# Altium PCB J-Link ARM-OB.PcbDoc
Units mil, origin at the board's own origin, x right, y up, seen from the top; angles counter-clockwise.
Board outline 1424 x 783 mil, 2 copper layers (Top Layer, Bottom Layer); 28 components, 28 nets, 112 pads, 16 vias.
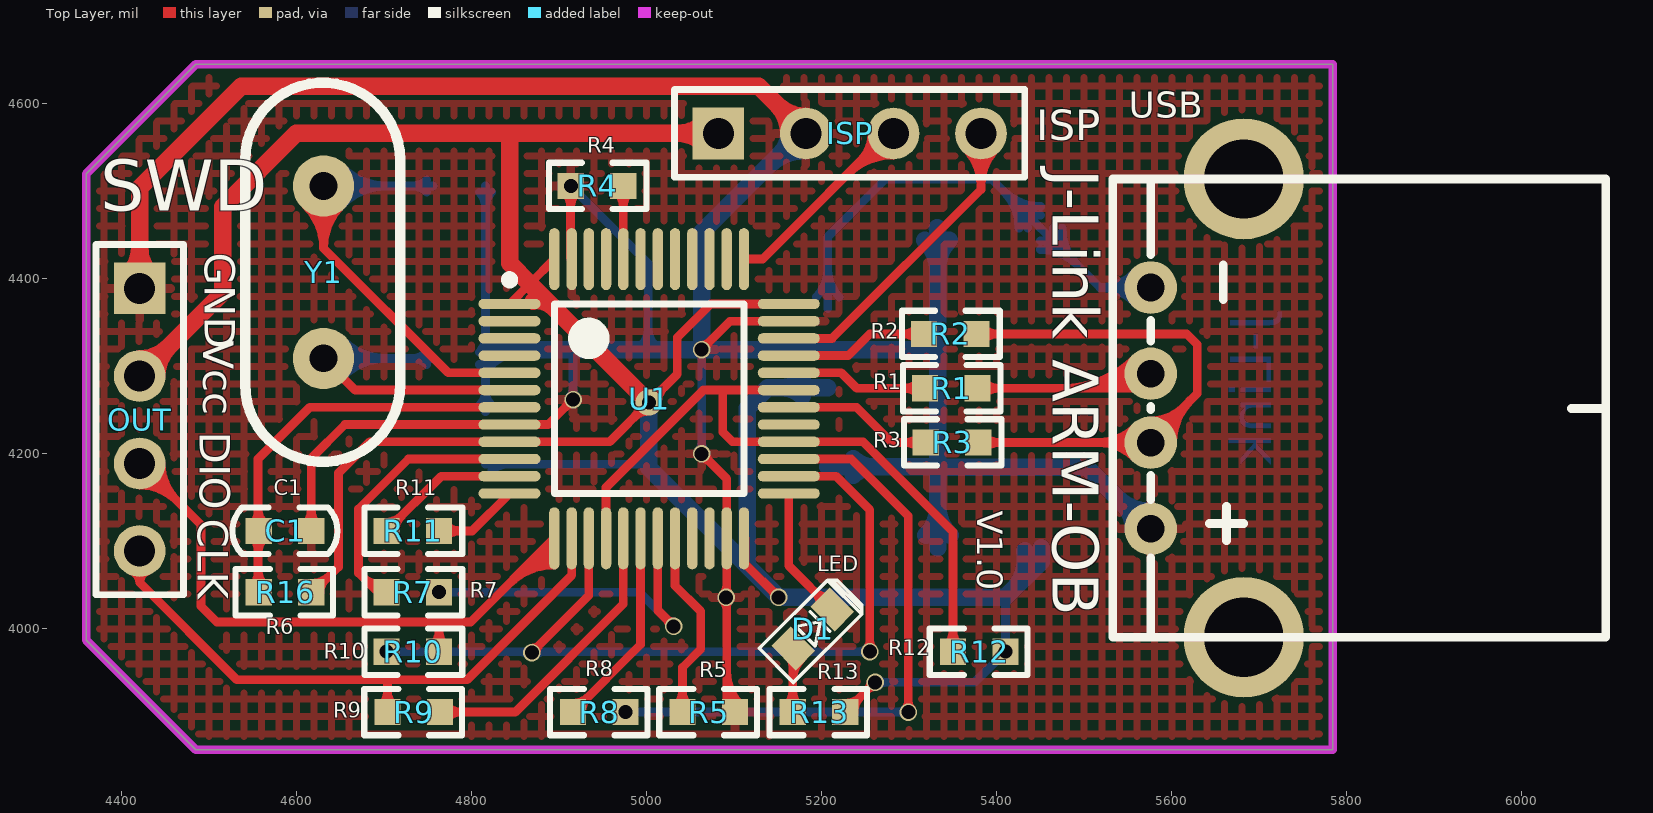
[diagram p0: Top Layer view]
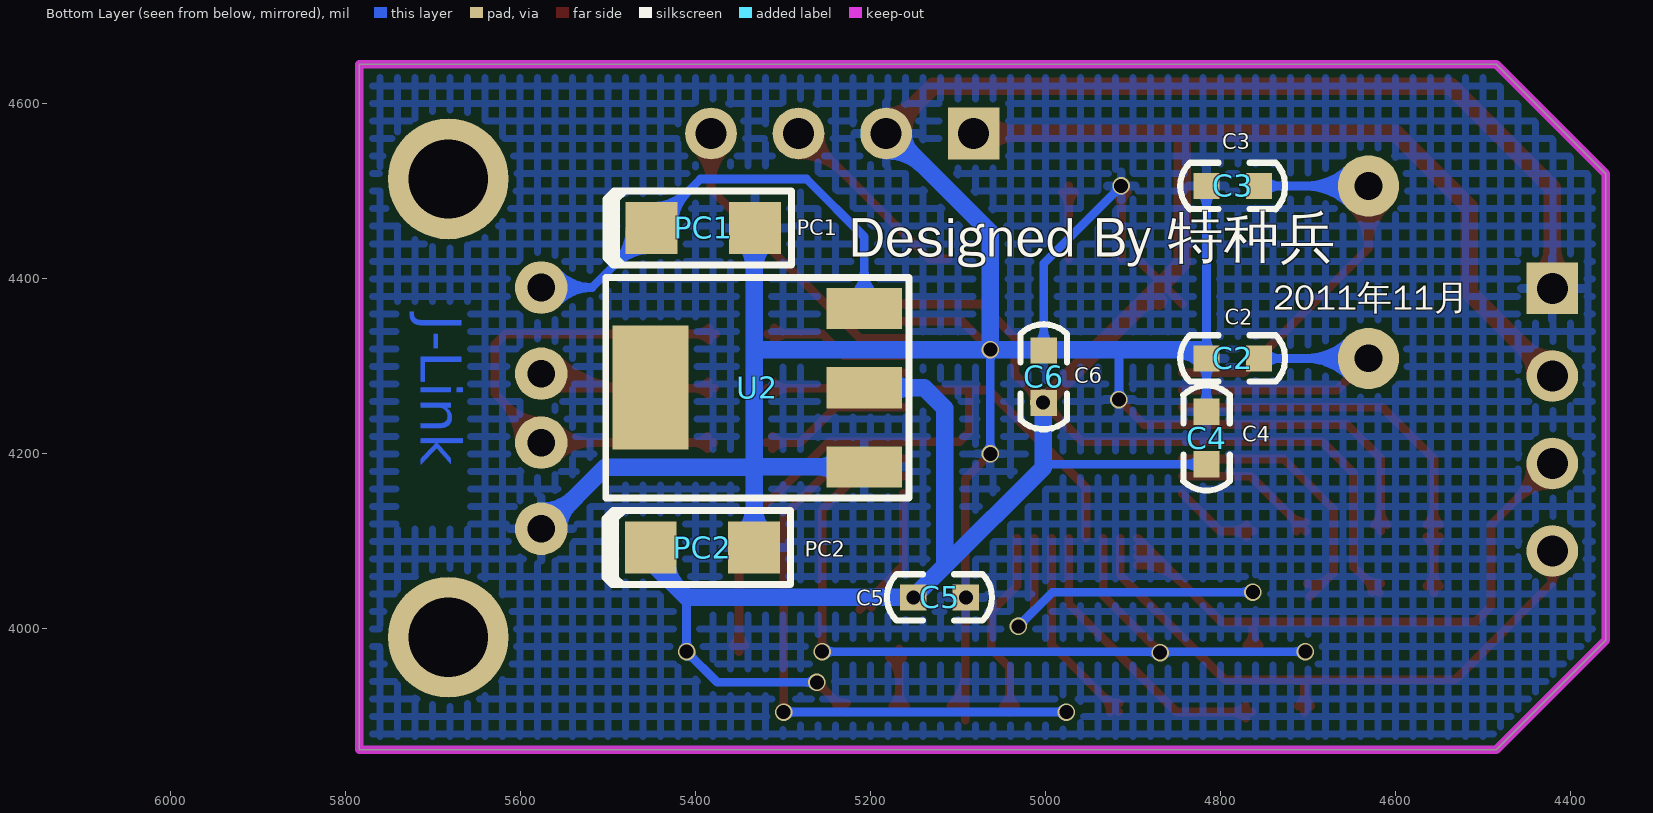
[diagram p1: Bottom Layer view, seen from below]
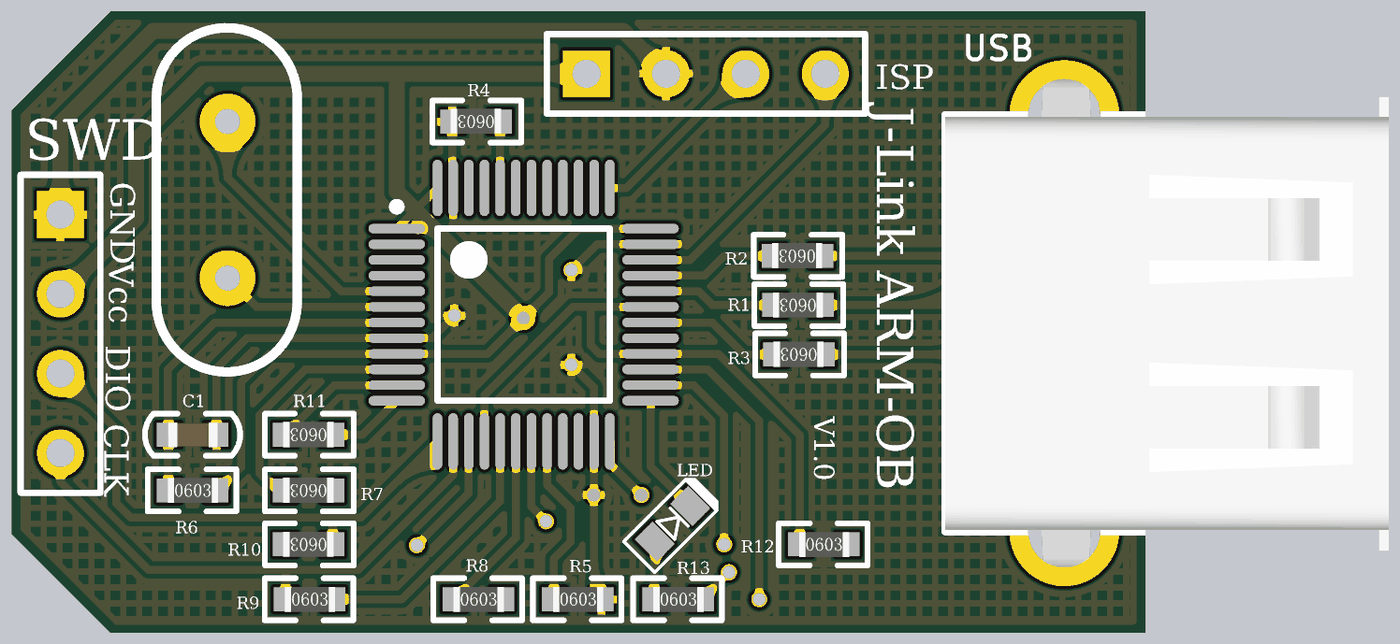
[diagram p2: 3D render of the assembled board from above, using the file's embedded part models]
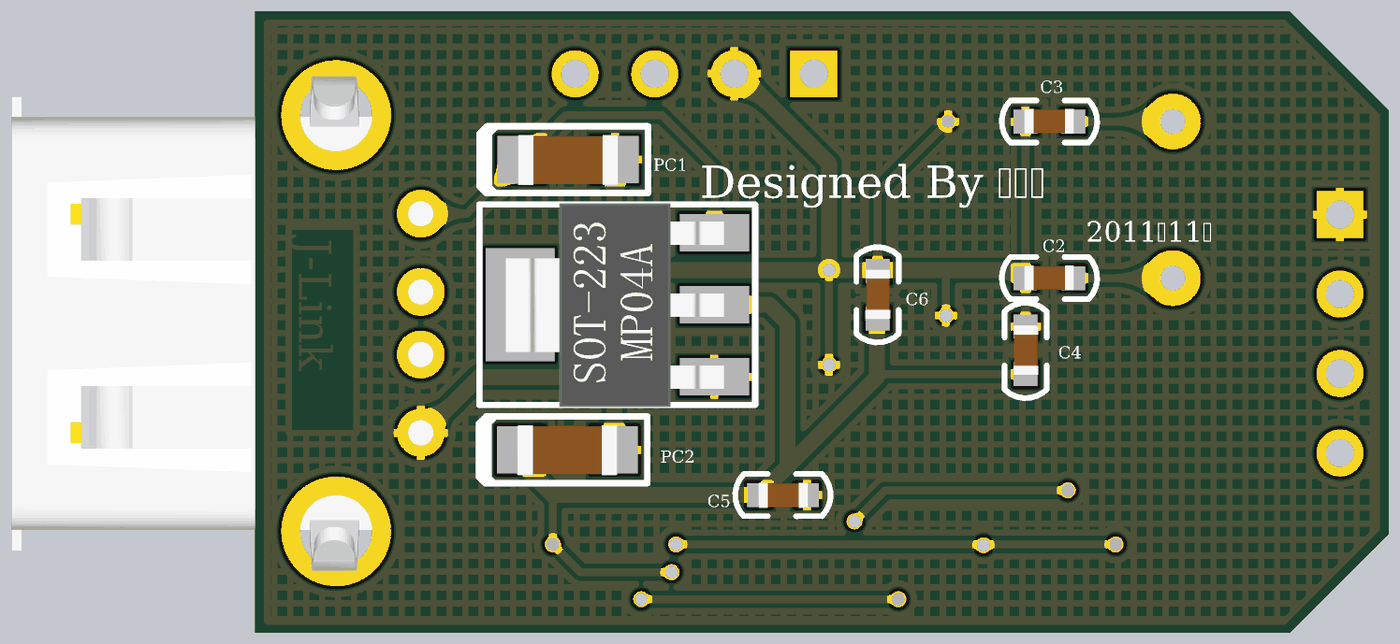
[diagram p3: 3D render of the assembled board from below, using the file's embedded part models]

## Layer stack, top to bottom
Top Layer: signal copper 1.4
Dielectric: dielectric 12.6, FR-4, Dk 4.8
Bottom Layer: signal copper 1.4

## Board outline
4360,4520 4485,4645 5784,4645 5784,3862 4485,3862 4360,3987

## Design rules (kind name [scope] priority, off if disabled: settings)
Clearance [All] p1: gap=6
PolygonConnect [All] p1: connectstyle=Relief reliefconductorwidth=10 reliefentries=4 polygonreliefangle="90 Angle"
RoutingVias [All] p1: holewidth=28 width=50 viastyle="Through Hole" minholewidth=28 minwidth=50 maxholewidth=28 maxwidth=50
SilkscreenOverComponentPads [All] p1: minsilkscreentomaskgap=10
SolderMaskExpansion [All] p1: expansion=4
Width [All] p1: maxlimit=50 minlimit=10 preferedwidth=10
27 further rules are at their usual default settings.

## Components (designator, comment, footprint, x,y, rotation, side; value= is the part's Value field where it differs from the comment)
C1 "" C0603 4557,4112 r0 top
C2 "" C0603 4756,4309 r0 bottom
C3 "" C0603 4756,4506 r0 bottom
C4 "" C0603 4816,4188 r90 bottom
C5 "" C0603 5151,4036 r180 bottom
C6 "" C0603 5002,4258 r90 bottom
D1 "LED" LED0603 5190,4000 r45 top
ISP "SWD" HDR1X4 5082,4566 r0 top
OUT "SWD" HDR1X4 4421,4389 r270 top
PC1 "" C1206A 5450,4458 r180 bottom
PC2 "" C1206A 5451,4093 r180 bottom
R1 "" R0603 5378,4275 r180 top
R2 "" R0603 5377,4337 r180 top
R3 "" R0603 5379,4213 r180 top
R4 "" R0603 4973.47,4506 r180 top
R5 "" R0603 5041,3905 r0 top
R7 "" R0603 4763,4042 r180 top
R8 "" R0603 4916,3905 r0 top
R9 "" R0603 4704,3905 r0 top
R10 "" R0603 4763,3974 r180 top
R11 "" R0603 4763,4112 r180 top
R12 "" R0603 5350,3974 r0 top
R13 "" R0603 5167,3905 r0 top
R16 "" R0603 4557,4042 r0 top
U1 "STM32F103C8T6" LQFP48_N 5003,4263 r0 top
U2 "AMS1117 3.3" SOT-223 5207,4185 r90 bottom
USB "USB公口" USB-H 5576,4390 r90 top
Y1 "8MHz" JZ 4631,4506 r90 top

## Footprints (in the part's own frame and the unit in brackets; to place one, negate y for a bottom-side part, rotate by r counter-clockwise, add the part's x,y. Pads: shape width x height; smd on the part's side, far side on the other; paste and mask are expansions set on the pad)
C0603 [mil]
  rect 30x30 smd: 1(0,0) 2(60,0)
  silkscreen extent -30,-27 90,27, body extent -1,-16 62,15, height 24
C1206A [mm]
  rect 1.5x1.5 smd: 1(0,0) 2(3,0)
  silkscreen extent -1.32,-1.07 4.06,1.07, body extent -0.1,-0.81 3.1,0.79, height 0.95
HDR1X4 [mm] "Connector; Header; 4 Position"
  rect 1.5x1.5 hole 0.9: 1(0,0)
  round 1.5 hole 0.9: 2(2.54,0) 3(5.08,0) 4(7.62,0)
  silkscreen extent -1.27,-1.27 8.89,1.27
JZ [mil]
  round 70 hole 31.5: 1(0,0) 2(-197,0)
  silkscreen extent -315,-88 118,90
LED0603 [mm]
  rect 0.8x1 smd: 1(-0.8,0) 2(0.8,0)
  silkscreen extent -1.5,-0.7 1.5,0.7
LQFP48_N [mm] "Thin QFP, 48-Leads, Body 7x7mm, Pitch 0.5mm, IPC Medium Density"
  oval 1.8x0.3 smd: 1(-4.05,2.75) 2(-4.05,2.25) 3(-4.05,1.75) 4(-4.05,1.25) 5(-4.05,0.75) 6(-4.05,0.25) 7(-4.05,-0.25) 8(-4.05,-0.75) 9(-4.05,-1.25) 10(-4.05,-1.75) 11(-4.05,-2.25) 12(-4.05,-2.75) 25(4.05,-2.75) 26(4.05,-2.25) 27(4.05,-1.75) 28(4.05,-1.25) 29(4.05,-0.75) 30(4.05,-0.25) 31(4.05,0.25) 32(4.05,0.75) 33(4.05,1.25) 34(4.05,1.75) 35(4.05,2.25) 36(4.05,2.75)
  oval 0.3x1.8 smd: 13(-2.75,-4.05) 14(-2.25,-4.05) 15(-1.75,-4.05) 16(-1.25,-4.05) 17(-0.75,-4.05) 18(-0.25,-4.05) 19(0.25,-4.05) 20(0.75,-4.05) 21(1.25,-4.05) 22(1.75,-4.05) 23(2.25,-4.05) 24(2.75,-4.05) 37(2.75,4.05) 38(2.25,4.05) 39(1.75,4.05) 40(1.25,4.05) 41(0.75,4.05) 42(0.25,4.05) 43(-0.25,4.05) 44(-0.75,4.05) 45(-1.25,4.05) 46(-1.75,4.05) 47(-2.25,4.05) 48(-2.75,4.05)
  silkscreen extent -4.17,-2.75 2.75,3.57, body extent -3.5,-3.5 3.5,3.5, height 1.6
R0603 [mil]
  rect 30x30 smd: 1(0,0) 2(60,0)
  silkscreen extent -27,-27 85,27, body extent -1,-16 62,15, height 18
SOT-223 [mm]
  rect 1.2x2.2 smd: 1(0,0) 2(2.3,0) 3(4.6,0)
  rect 3.6x2.2 smd: 4(2.3,6.2)
  silkscreen extent -0.9,-1.3 5.5,7.5, body extent -0.97,-0.31 5.53,6.66
USB-H [mm]
  round 1.524 hole 0.8: 1(0,0) 2(-2.5,0) 3(-4.5,0) 4(-7,0)
  round 3.5 hole 2.3: 5(-10.15,-2.7) 5(3.15,-2.7)
  silkscreen extent -10.15,-13.2 3.15,1.1, body extent -11.4,-13.06 4.4,1.1, height 7.55

## Part data
C1 C2 C3 C4 C5 C6: library part Cap, "Capacitor"
D1: library part LED2, "Typical RED, GREEN, YELLOW, AMBER GaAs LED"
ISP OUT: library part "Header 4", "Header, 4-Pin"
PC1 PC2: library part "Cap Pol3", "Polarized Capacitor (Surface Mount)"
R1 R2 R3 R4 R5 R7 R8 R9 R10 R11 R12 R13 R16: library part Res2, "Resistor"
U1: "STM32 ARM-based 32-bit MCU with 64 Kbytes Flash, 48-pin LQFP, Industrial Temperature"
U2: library part LM117T
USB: library part US
Y1: library part XTAL, "Crystal Oscillator"

## Via types
v1: diameter 20, hole 16, Top Layer to Bottom Layer, 15 vias
v2: diameter 30, hole 16, Top Layer to Bottom Layer, 1 vias

## Nets (pads, with @x,y where several pads share a name; then routed paths per layer and width w, separated by ;. In a path a pad name is that pad's centre, name@x,y a point inside that pad or via, vN(x,y) a via of type N, cw(c..) or ccw(c..) an arc to the next point about the centre after c; other vN are vias at no path point)
GND: C1.2 C2.2 C3.2 C4.2 C5.2 C6.2 ISP.2 OUT.1 PC1.2 PC2.2 R4.2 R5.2 U1.8 U1.23 U1.35 U1.47 U2.1 USB.4 | length 5188.6
  Top Layer w10: OUT.1 OUT.1@4437,4373 ; C1.2@4609.93,4119.07 ccw(c4592.86,4136.14) 4617,4136.14 ccw(c4641.14,4136.14) C1.2@4624.07,4119.07 ; C1.2 4617,4195 4655.47,4233.47 U1.8 4887.47,4233.47 v1(4916,4262) ; R4.2@4906.4,4498.93 cw(c4890.47,4483) 4913,4483 ; R4.2@4909.94,4502.46 cw(c4902.54,4495.07) R4.2@4913,4495.07 ; v1@4911,4262 cw(c4898.93,4262) 4907.46,4253.46 cw(c4916,4244.93) v1@4916,4257 ; U1.47@4913,4423.87 R4.2@4913,4506 ; 4913,4480.72 cw(c4938.76,4480.72) R4.2@4920.54,4498.93 ; R4.2@4913,4492.79 cw(c4926.68,4492.79) R4.2@4917.01,4502.46 ; v1@5063,4195 cw(c5063,4182.93) 5071.54,4191.46 cw(c5080.07,4200) v1@5068,4200 ; v1(5063,4200) 5091.58,4171.42 U1.23 R5.2@5091.58,3896 ; v1(5063,4319.17) 5095.41,4351.58 U1.35 ; v1@5063,4324.17 ccw(c5063,4336.24) 5071.54,4327.71 ccw(c5080.07,4319.17) v1@5068,4319.17 ; v1@5087.46,4032.46 cw(c5077.52,4022.52) 5091.58,4022.52 ; v1@5087.46,4039.54 ccw(c5077.52,4049.48) 5091.58,4049.48 ; 5091.58,3927.74 ccw(c5123.74,3927.74) R5.2 ; 5091.58,3951.88 ccw(c5147.88,3951.88) R5.2@5108.07,3912.07 ; 5091.58,4025.34 cw(c5101.66,4025.34) v1@5094.54,4032.46 ; 5091.58,4046.66 ccw(c5101.66,4046.66) v1@5094.54,4039.54
  Top Layer w20: OUT.1@4407.19,4402.81 ccw(c4373.86,4436.14) 4421,4436.14 ccw(c4468.14,4436.14) OUT.1@4434.81,4402.81 ; OUT.1 4421,4504 4537,4620 5128,4620 ISP.2 ; ISP.2@5162.47,4566 ccw(c5115.33,4566) 5148.66,4599.34 ccw(c5182,4632.67) ISP.2@5182,4585.53
  Bottom Layer w10: C4.2@4808.93,4255.07 ccw(c4791.86,4272.14) 4816,4272.14 ccw(c4840.14,4272.14) C4.2@4823.07,4255.07 ; C2.2@4808.93,4301.93 cw(c4791.86,4284.86) 4816,4284.86 cw(c4840.14,4284.86) C2.2@4823.07,4301.93 ; C2.2@4808.93,4316.07 ccw(c4791.86,4333.14) 4816,4333.14 ccw(c4840.14,4333.14) C2.2@4823.07,4316.07 ; C3.2@4808.93,4498.93 cw(c4791.86,4481.86) 4816,4481.86 cw(c4840.14,4481.86) C3.2@4823.07,4498.93 ; C4.2 C2.2 4816,4317 C3.2 ; v1@4912.46,4265.54 ccw(c4903.93,4274.07) 4916,4274.07 ccw(c4928.07,4274.07) v1@4919.54,4265.54 ; v1@4913.47,4501 cw(c4913.47,4488.93) 4922.01,4497.46 cw(c4930.54,4506) v1@4918.47,4506 ; v1(4913.47,4506) 5002,4417.47 5002,4319.17 C6.2 ; v1(4916,4262) 4916,4318 ; C6.2@4994.93,4325.07 ccw(c4977.86,4342.14) 5002,4342.14 ccw(c5026.14,4342.14) C6.2@5009.07,4325.07 ; v1@5059.46,4203.54 ccw(c5050.93,4212.07) 5063,4212.07 ccw(c5075.07,4212.07) v1@5066.54,4203.54 ; v1@5059.46,4315.64 cw(c5050.93,4307.1) 5063,4307.1 cw(c5075.07,4307.1) v1@5066.54,4315.64 ; v1(5063,4200) v1@5063,4318 ; 5502.41,4185 5502.73,4184.69
  Bottom Layer w20: C2.2@4816,4317 4818.17,4319.17 5002,4319.17 v1(5063,4319.17) ; C2.2@4819.54,4305.46 cw(c4852.63,4272.37) 4852.63,4319.17 ; 5138.42,4528.42 cw(c5182,4484.84) ISP.2@5182,4546.47 ; 5152.91,4542.91 ccw(c5129.81,4566) ISP.2@5162.47,4566 ; ISP.2@5182,4572 5063,4453 v1(5063,4319.17) ; U2.1 5331.89,4185 ; U2.1@5236.32,4175.37 cw(c5259.57,4152.11) 5259.57,4185 cw(c5259.57,4217.89) U2.1@5236.32,4194.63 ; PC1.2@5318.08,4444.19 cw(c5282.33,4408.44) 5332.89,4408.44 ; PC2.2@5319.08,4106.81 ccw(c5285.75,4140.14) 5332.89,4140.14 ccw(c5380.03,4140.14) PC2.2@5346.7,4106.81 ; PC1.2 5332.89,4457 5332.89,4319.17 ; PC2.2 5332.89,4184.69 ; 5332.89,4413.27 cw(c5376.62,4413.27) PC1.2@5345.7,4444.19 ; 5536.74,4150.67 ccw(c5576,4189.94) USB.4@5576,4134.41 ; 5543.98,4143.43 cw(c5514.96,4114.41) USB.4@5556,4114.41 ; USB.4@5574.5,4112.91 5502.73,4184.69 5332.89,4184.69 ; v1(5063,4319.17) 5332.89,4319.17 ; 5331.89,4185 5332.2,4184.69 5332.89,4184.69 ; 5331.89,4185 5332.89,4186 5332.89,4319.17
  other v1: 5091,4036
JTCK: ISP.3 U1.37 | length 364.6
  Top Layer w10: U1.37 5132.45,4422.45 ISP.3@5282,4572 ; 5229.89,4519.89 cw(c5282,4467.77) ISP.3@5282,4541.47 ; 5244.37,4534.37 ccw(c5212.74,4566) ISP.3@5257.47,4566 ; 5246.96,4536.96 cw(c5282,4501.91) ISP.3@5282,4551.47
JTMS: ISP.4 U1.34 | length 508.1
  Top Layer w10: U1.34 5211.9,4331.9 5382,4502 ISP.4@5382,4572 ; ISP.4@5364.66,4548.66 cw(c5322.79,4506.79) 5382,4506.79 cw(c5441.21,4506.79) ISP.4@5399.34,4548.66 ; ISP.4@5371.73,4555.73 cw(c5346.93,4530.93) 5382,4530.93 cw(c5417.07,4530.93) ISP.4@5392.27,4555.73
LED: D1.2 U1.25 | length 193.9
  Top Layer w10: U1.25 5162.45,4072.09 D1.2 ; D1.2@5198.74,4025.05 ccw(c5172.79,4025.05) 5191.14,4043.4 ccw(c5209.49,4061.75) D1.2@5209.49,4035.8
NetD1_1: D1.1 R13.1 | length 150.7
  Top Layer w10: R13.1@5159.93,3912.07 ccw(c5142.86,3929.14) 5167,3929.14 ccw(c5191.14,3929.14) R13.1@5174.07,3912.07 ; D1.1@5162.91,3967.35 cw(c5153.05,3957.48) D1.1@5167,3957.48 ; R13.1 D1.1@5167,3977 ; 5167,3940.52 cw(c5204.94,3940.52) D1.1@5178.11,3967.35
NetR1_1: R1.1 USB.2 | length 493.4
  Top Layer w10: R1.1 5556.42,4275 USB.2@5573,4291.58 ; R1.1@5385.07,4267.93 cw(c5402.14,4250.86) 5402.14,4275 cw(c5402.14,4299.14) R1.1@5385.07,4282.07 ; 5475.63,4275 ccw(c5475.63,4391.95) USB.2@5558.32,4309.25 ; 5499.77,4275 ccw(c5499.77,4367.8) USB.2@5565.39,4302.18 ; 5523.91,4275 ccw(c5523.91,4343.66) USB.2@5572.46,4295.11 ; 5548.06,4275 ccw(c5548.06,4319.52) USB.2@5579.54,4288.04
NetR2_1: R2.1 R3.1 USB.3 | length 965.4
  Top Layer w10: R2.1 5617,4337 5629,4325 5629,4269 5573,4213 R3.1 ; R2.1@5384.07,4329.93 cw(c5401.14,4312.86) 5401.14,4337 cw(c5401.14,4361.14) R2.1@5384.07,4344.07 ; R3.1@5386.07,4205.93 cw(c5403.14,4188.86) 5403.14,4213 cw(c5403.14,4237.14) R3.1@5386.07,4220.07 ; 5515.25,4213 cw(c5515.25,4152.08) USB.3@5558.32,4195.16 ; 5516.04,4213 ccw(c5516.04,4272.79) USB.3@5558.32,4230.51 ; 5539.39,4213 cw(c5539.39,4176.22) USB.3@5565.39,4202.23 ; 5540.19,4213 ccw(c5540.19,4248.65) USB.3@5565.39,4223.44 ; USB.3@5576,4227.84 ccw(c5576,4256.41) 5596.2,4236.2 ; USB.3@5576,4237.84 ccw(c5576,4290.55) 5613.27,4253.27 ; USB.3@5591,4212.84 cw(c5634.85,4212.84) 5603.84,4243.84 ; USB.3@5601,4212.84 cw(c5669,4212.84) 5620.92,4260.92
NetR4_1: R4.1 U1.44 | length 121.5
  Top Layer w10: R4.1@4966.4,4498.93 cw(c4949.33,4481.86) 4973.47,4481.86 cw(c4997.61,4481.86) R4.1@4980.54,4498.93 ; U1.44 R4.1
NetR5_1: R5.1 U1.20 | length 257.4
  Top Layer w10: U1.20 5032.53,4049.47 5062,4020 5062,3977 5041,3956 R5.1 ; R5.1@5033.93,3912.07 ccw(c5016.86,3929.14) 5041,3929.14 ccw(c5065.14,3929.14) R5.1@5048.07,3912.07
NRST: C1.1 R16.1 U1.7 | length 578.1
  Top Layer w10: R16.1@4549.93,4049.07 ccw(c4535.27,4063.73) 4556,4063.73 ; C1.1@4549.93,4104.93 cw(c4535.27,4090.27) 4556,4090.27 ; C1.1@4549.93,4119.07 ccw(c4535.27,4133.73) 4556,4133.73 ; R16.1@4556,4041.75 4556,4194 4615.16,4253.16 U1.7 ; 4556,4068.56 ccw(c4583.56,4068.56) R16.1@4564.07,4049.07 ; 4556,4085.44 cw(c4583.56,4085.44) C1.1@4564.07,4104.93 ; 4556,4138.56 ccw(c4583.56,4138.56) C1.1@4564.07,4119.07
OSC_IN: C3.1 U1.5 Y1.1 | length 879
  Top Layer w10: Y1.1@4610.09,4484.49 cw(c4561.99,4435) 4631,4435 ; Y1.1@4617.06,4491.66 cw(c4585,4458.67) 4631,4458.67 cw(c4677,4458.67) Y1.1@4644.94,4491.66 ; Y1.1 4631,4435 ; Y1.1@4651.91,4484.49 ccw(c4700.01,4435) 4631,4435 ; U1.5 4773.47,4292.53 4631,4435
  Bottom Layer w10: Y1.1 C3.1 ; Y1.1@4645.14,4491.86 cw(c4679.28,4457.72) 4679.28,4506 cw(c4679.28,4554.28) Y1.1@4645.14,4520.14 ; Y1.1@4652.21,4484.79 cw(c4703.43,4433.57) 4703.43,4506 cw(c4703.43,4578.43) Y1.1@4652.21,4527.21 ; C3.1@4748.93,4498.93 ccw(c4731.86,4481.86) 4731.86,4506 ccw(c4731.86,4530.14) C3.1@4748.93,4513.07
OSC_OUT: C2.1 U1.6 Y1.2 | length 580.1
  Top Layer w10: Y1.2 4667.16,4272.84 U1.6
  Bottom Layer w10: Y1.2 C2.1 ; Y1.2@4645.14,4294.86 cw(c4679.28,4260.72) 4679.28,4309 cw(c4679.28,4357.28) Y1.2@4645.14,4323.14 ; Y1.2@4652.21,4287.79 cw(c4703.43,4236.57) 4703.43,4309 cw(c4703.43,4381.43) Y1.2@4652.21,4330.21 ; C2.1@4748.93,4301.93 ccw(c4731.86,4284.86) 4731.86,4309 ccw(c4731.86,4333.14) C2.1@4748.93,4316.07
TCKIN: OUT.3 R10.1 U1.13 | length 979.8
  Top Layer w10: OUT.3@4421,4164.47 cw(c4421,4105.26) 4462.87,4147.13 cw(c4504.74,4189) OUT.3@4445.53,4189 ; OUT.3@4421,4174.47 cw(c4421,4139.4) 4445.8,4164.2 cw(c4470.6,4189) OUT.3@4435.53,4189 ; OUT.3 4491,4119 4491,4026 4509,4008 4763,4008 ; R10.1@4755.93,3981.07 ccw(c4738.86,3998.14) 4763,3998.14 ccw(c4787.14,3998.14) R10.1@4770.07,3981.07 ; R10.1 4763,4008 ; 4842.78,4051.6 cw(c4894.73,3999.65) U1.13@4894.73,4073.12 ; 4859.85,4068.67 cw(c4894.73,4033.79) U1.13@4894.73,4083.12 ; 4876.92,4085.74 cw(c4894.73,4067.93) U1.13@4894.73,4093.12 ; U1.13@4893.99,4102.81 cw(c4894.73,4102.07) U1.13@4894.73,4103.12 ; U1.13 4799.18,4008 4763,4008
TCKOUT: R10.2 U1.15 U1.26 | length 1080.2
  Top Layer w10: v1(4869,3973) 4934.1,4038.1 U1.15 ; v1@4869,3978 ccw(c4869,3990.07) 4877.54,3981.54 ccw(c4886.07,3973) v1@4874,3973 ; U1.26 5216.58,4174.42 5255,4136 v1(5255,3974) ; v1@5251.46,3977.54 ccw(c5242.93,3986.07) 5255,3986.07 ccw(c5267.07,3986.07) v1@5258.54,3977.54
  Bottom Layer w10: v1(4703,3974) v1(5255,3974) ; v1@4706.54,3970.46 cw(c4715.07,3961.93) 4715.07,3974 cw(c4715.07,3986.07) v1@4706.54,3977.54 ; 4854.51,3974 cw(c4854.51,3958.51) v1@4865.46,3969.46 ; v1@4872.54,3969.46 cw(c4883.49,3958.51) 4883.49,3974 ; v1@5251.46,3970.46 ccw(c5242.93,3961.93) 5242.93,3974 ccw(c5242.93,3986.07) v1@5251.46,3977.54
TDIIN: R8.1 U1.18 | length 267.7
  Top Layer w10: R8.1@4916,3915 ccw(c4916,3939.14) 4933.07,3922.07 ccw(c4950.14,3905) R8.1@4926,3905 ; R8.1@4916.5,3905.5 4993.16,3982.16 U1.18
TDIOUT: R8.2 U1.27 | length 767.4
  Top Layer w10: U1.27 5233.9,4194.1 5299,4129 v1(5299,3905) ; v1@5295.46,3908.54 ccw(c5286.93,3917.07) 5299,3917.07 ccw(c5311.07,3917.07) v1@5302.54,3908.54
  Bottom Layer w10: v1(4976,3905) v1(5299,3905) ; v1@4979.54,3901.46 cw(c4988.07,3892.93) 4988.07,3905 cw(c4988.07,3917.07) v1@4979.54,3908.54 ; v1@5295.46,3901.46 ccw(c5286.93,3892.93) 5286.93,3905 ccw(c5286.93,3917.07) v1@5295.46,3908.54
TDOIN: R12.1 U1.16 U1.28 U1.31 | length 846
  Top Layer w10: U1.16 4953.79,4161.79 5064.84,4272.84 5087,4272.84 ; 5087,4273 5087,4272.84 ; U1.31 5087,4272.84 ; R12.1@5342.93,3981.07 ccw(c5325.86,3998.14) 5350,3998.14 ccw(c5374.14,3998.14) R12.1@5357.07,3981.07 ; R12.1 5350,4111 5247.21,4213.79 U1.28 5098.21,4213.79 5087,4225 5087,4272.84
TMSIN: OUT.4 R9.1 U1.14 | length 775.8
  Top Layer w10: OUT.4@4412.03,4066.17 cw(c4406.85,4053) 4421,4053 ; OUT.4 4421,4053 ; OUT.4@4429.97,4066.17 ccw(c4435.15,4053) 4421,4053 ; R9.1@4696.93,3912.07 ccw(c4679.86,3929.14) 4704,3929.14 ccw(c4728.14,3929.14) R9.1@4711.07,3912.07 ; R9.1 4704,3942 ; U1.14 4914.42,4061.42 4795,3942 4704,3942 ; 4421,4053 4532,3942 4704,3942
TMSOUT: R9.2 U1.17 | length 373.6
  Top Layer w10: R9.2 4850,3905 4973.47,4028.47 U1.17 ; R9.2@4771.07,3897.93 cw(c4788.14,3880.86) 4788.14,3905 cw(c4788.14,3929.14) R9.2@4771.07,3912.07
TRESIN: R11.1 U1.12 | length 136.2
  Top Layer w10: R11.1 4800.82,4112 U1.12 ; R11.1@4770.07,4104.93 cw(c4787.14,4087.86) 4787.14,4112 cw(c4787.14,4136.14) R11.1@4770.07,4119.07
TRESOUT: R11.2 U1.11 | length 204.3
  Top Layer w10: R11.2 4765.42,4174.42 U1.11 ; R11.2@4703,4122 ccw(c4703,4146.14) 4720.07,4129.07 ccw(c4737.14,4112) R11.2@4713,4112
TRSTIN: R7.1 U1.19 | length 449.1
  Top Layer w10: U1.19 5012.84,4021.16 v1(5031,4003) ; v1@5026,4003 ccw(c5013.93,4003) 5022.46,4011.54 ccw(c5031,4020.07) v1@5031,4008
  Bottom Layer w10: v1(4763,4042) 4992,4042 v1(5031,4003) ; v1@4766.54,4038.46 cw(c4775.07,4029.93) 4775.07,4042 cw(c4775.07,4054.07) v1@4766.54,4045.54 ; v1@5026,4003 ccw(c5013.93,4003) 5022.46,4011.54 ccw(c5031,4020.07) v1@5031,4008
TRSTOUT: R7.2 U1.10 | length 334.4
  Top Layer w10: 4676,4059 ccw(c4695.01,4078.01) R7.2@4700.83,4051.76 ; R7.2@4698,4037 4671,4064 4671,4137 4728.1,4194.1 U1.10
USBD+: R2.2 U1.33 | length 202.7
  Top Layer w10: U1.33 5230.21,4312.21 5255,4337 R2.2 ; R2.2@5309.93,4329.93 ccw(c5292.86,4312.86) 5292.86,4337 ccw(c5292.86,4361.14) R2.2@5309.93,4344.07
USBD-: R1.2 U1.32 | length 200.7
  Top Layer w10: U1.32 5222.47,4292.53 5240,4275 R1.2 ; R1.2@5310.93,4267.93 ccw(c5293.86,4250.86) 5293.86,4275 ccw(c5293.86,4299.14) R1.2@5310.93,4282.07
USBD_EN: R3.2 U1.30 | length 211.1
  Top Layer w10: U1.30 5239.84,4253.16 5280,4213 R3.2 ; R3.2@5311.93,4205.93 ccw(c5294.86,4188.86) 5294.86,4213 ccw(c5294.86,4237.14) R3.2@5311.93,4220.07
V5.0: PC1.1 U2.3 USB.1 | length 1038.8
  Bottom Layer w10: U2.3@5193.83,4379.27 ccw(c5162.04,4411.06) 5207,4411.06 ccw(c5251.96,4411.06) U2.3@5220.17,4379.27 ; U2.3 5207,4448 5273,4514 5394,4514 PC1.1 5518,4390 ; PC1.1@5425.47,4458 ccw(c5366.26,4458) 5408.13,4499.87 ccw(c5450,4541.74) PC1.1@5450,4482.53 ; PC1.1@5435.47,4458 ccw(c5400.4,4458) 5425.2,4482.8 ccw(c5450,4507.6) PC1.1@5450,4472.53 ; PC1.1@5450,4433.47 cw(c5450,4374.26) 5491.87,4416.13 cw(c5533.74,4458) PC1.1@5474.53,4458 ; PC1.1@5450,4443.47 cw(c5450,4408.4) 5474.8,4433.2 cw(c5499.6,4458) PC1.1@5464.53,4458 ; USB.1@5557.82,4372.83 ccw(c5518,4335.23) 5518,4390 ; USB.1@5557.82,4407.17 cw(c5518,4444.77) 5518,4390 ; USB.1@5565.09,4379.7 ccw(c5541.2,4357.14) 5541.2,4390 ccw(c5541.2,4422.86) USB.1@5565.09,4400.3 ; USB.1@5567,4411 5546,4390 5518,4390
VCC: C4.1 C5.1 C6.1 ISP.1 OUT.2 PC2.1 R12.2 R13.2 R16.2 U1.1 U1.9 U1.24 U1.36 U1.48 U2.2 | length 4063.9
  Top Layer w10: R16.2@4617,4052 ccw(c4617,4081.56) 4637.9,4060.66 ; R16.2@4618.99,4041.75 4648,4070.76 4648,4178 4683.79,4213.79 U1.9 4957.79,4213.79 v2@5002,4258 ; R16.2@4627,4042 cw(c4645.72,4042) 4632.48,4055.24 ; U1.1 4866.79,4394.51 U1.48 ; v2@4992.65,4258.65 cw(c4968.51,4258.65) 4985.58,4241.58 cw(c5002.65,4224.51) v2@5002.65,4248.65 ; v2(5002.65,4258.65) 5035,4291 5035,4333 5073.27,4371.27 U1.36 ; v2@5002.65,4268.65 ccw(c5002.65,4292.79) 5019.72,4275.72 ccw(c5036.79,4258.65) v2@5012.65,4258.65 ; U1.24@5112.49,4103.55 5112.49,4074.51 v1(5151,4036) ; v1@5146,4036 ccw(c5133.93,4036) 5142.46,4044.54 ccw(c5151,4053.07) v1@5151,4041 ; R13.2 v1(5261,3939) ; R13.2@5227,3915 ccw(c5227,3939.14) 5244.07,3922.07 ccw(c5261.14,3905) R13.2@5237,3905 ; v1@5256,3939 cw(c5243.93,3939) 5252.46,3930.46 cw(c5261,3921.93) v1@5261,3934
  Top Layer w20: OUT.2 4516,4384 4516,4482 4600,4566 4843.55,4566 ; OUT.2@4421,4308.53 ccw(c4421,4355.67) 4454.34,4322.34 ccw(c4487.67,4289) OUT.2@4440.53,4289 ; U1.1@4870.55,4374.49 cw(c4878.61,4364.23) 4887.84,4373.46 ; U1.1@4873.08,4375.36 cw(c4873.08,4344.32) 4895.03,4366.27 ; v2(5002.65,4258.65) 4866.79,4394.51 4843.55,4417.75 4843.55,4566 ; ISP.1@5068.19,4552.19 ccw(c5034.86,4518.86) 5034.86,4566 ccw(c5034.86,4613.14) ISP.1@5068.19,4579.81 ; ISP.1 4843.55,4566
  Bottom Layer w10: C4.1 5002,4188 ; C4.1@4823.07,4180.93 cw(c4840.14,4163.86) 4840.14,4188 cw(c4840.14,4212.14) C4.1@4823.07,4195.07 ; v1(5261,3939) 5375,3939 v1(5410,3974) 5410,4036 ; v1@5264.54,3935.46 cw(c5273.07,3926.93) 5273.07,3939 cw(c5273.07,3951.07) v1@5264.54,3942.54 ; v1@5405,3974 cw(c5392.93,3974) 5401.46,3965.46 cw(c5410,3956.93) v1@5410,3969 ; v1@5406.46,3977.54 ccw(c5397.93,3986.07) 5410,3986.07 ccw(c5422.07,3986.07) v1@5413.54,3977.54
  Bottom Layer w20: v2(5002.65,4258.65) 5002.65,4184.35 5115,4072 ; U2.2@5177.68,4265.92 ccw(c5154.43,4242.66) 5154.43,4275.55 ccw(c5154.43,4308.44) U2.2@5177.68,4285.18 ; U2.2 5138.55,4275.55 5115,4252 5115,4072 ; 5418,4044 ccw(c5382.37,4079.64) PC2.1@5431.83,4089.27 ; PC2.1 5451,4077 5410,4036 v1(5151,4036) 5115,4072
pads on no net: U1.2 U1.3 U1.4 U1.21 U1.22 U1.29 U1.38 U1.39 U1.40 U1.41 U1.42 U1.43 U1.45 U1.46 U2.4 USB.5

## Polygon pours and split planes (outlines as drawn)
GND on Top Layer "Bottom Layer-No Net" (hatched 90Degree grid 20 track 8): 5784,4645 4485,4645 4360,4520 4360,3987 4485,3862 5784,3862
GND on Bottom Layer "Bottom Layer-No Net" (hatched 90Degree grid 20 track 8): 5784,4645 4485,4645 4360,4520 4360,3987 4485,3862 5784,3862

## Keep-outs
Keep-Out Layer:
  the board outline again, w10

## Other copper
Bottom Layer:
  text "J-Link" at 5729,4359 h80 r90

## Silkscreen, mask and mechanical layers (free items; w line width, h text height)
Top Overlay:
  text "ISP" at 5445,4547 h60
  text "R4" at 4932,4538 h30
  text "J-Link ARM-OB" at 5447,4525 h90 r270
  text "SWD" at 4376,4458 h100
  text "GND" at 4484,4430 h60 r270
  text "Vcc" at 4482,4329 h60 r270
  text "R2" at 5256,4326 h30
  text "R1" at 5259,4268 h30
  text "DIO" at 4478,4225 h60 r270
  text "R3" at 5259,4201 h30
  text "C1" at 4574,4147 h30
  text "R11" at 4713,4147 h30
  text "V1.0" at 5368,4135 h50 r270
  text "CLK" at 4476,4126 h60 r270
  text "LED" at 5195,4060 h30
  text "R7" at 4798,4030 h30
  text "R6" at 4565,3988 h30
  text "R12" at 5276,3964 h30
  text "R10" at 4631,3960 h30
  text "R8" at 4930,3940 h30
  text "R5" at 5060,3939 h30
  text "R13" at 5195,3937 h30
  text "R9" at 4642,3893 h30
Bottom Overlay:
  text "C3" at 4798,4542 h30
  text "PC1" at 5284,4444 h30
  text "Designed By 特种兵" at 5225,4410 h80
  text "2011年11月" at 4740,4355 h50
  text "C2" at 4795,4342 h30
  text "C6" at 4967,4275 h30
  text "C4" at 4775,4208 h30
  text "PC2" at 5275,4077 h30
  text "C5" at 5216,4021 h30